# Altium PCB PCB1.PcbDoc (part 3 of 4)
Units mil, origin at the board's own origin, x right, y up, seen from the top; angles counter-clockwise.
Board outline 6000 x 4000 mil, 2 copper layers (Top Layer, Bottom Layer); 419 components, 314 nets, 2127 pads, 9 vias.
Unrouted connection lines stored in the file: 1258.
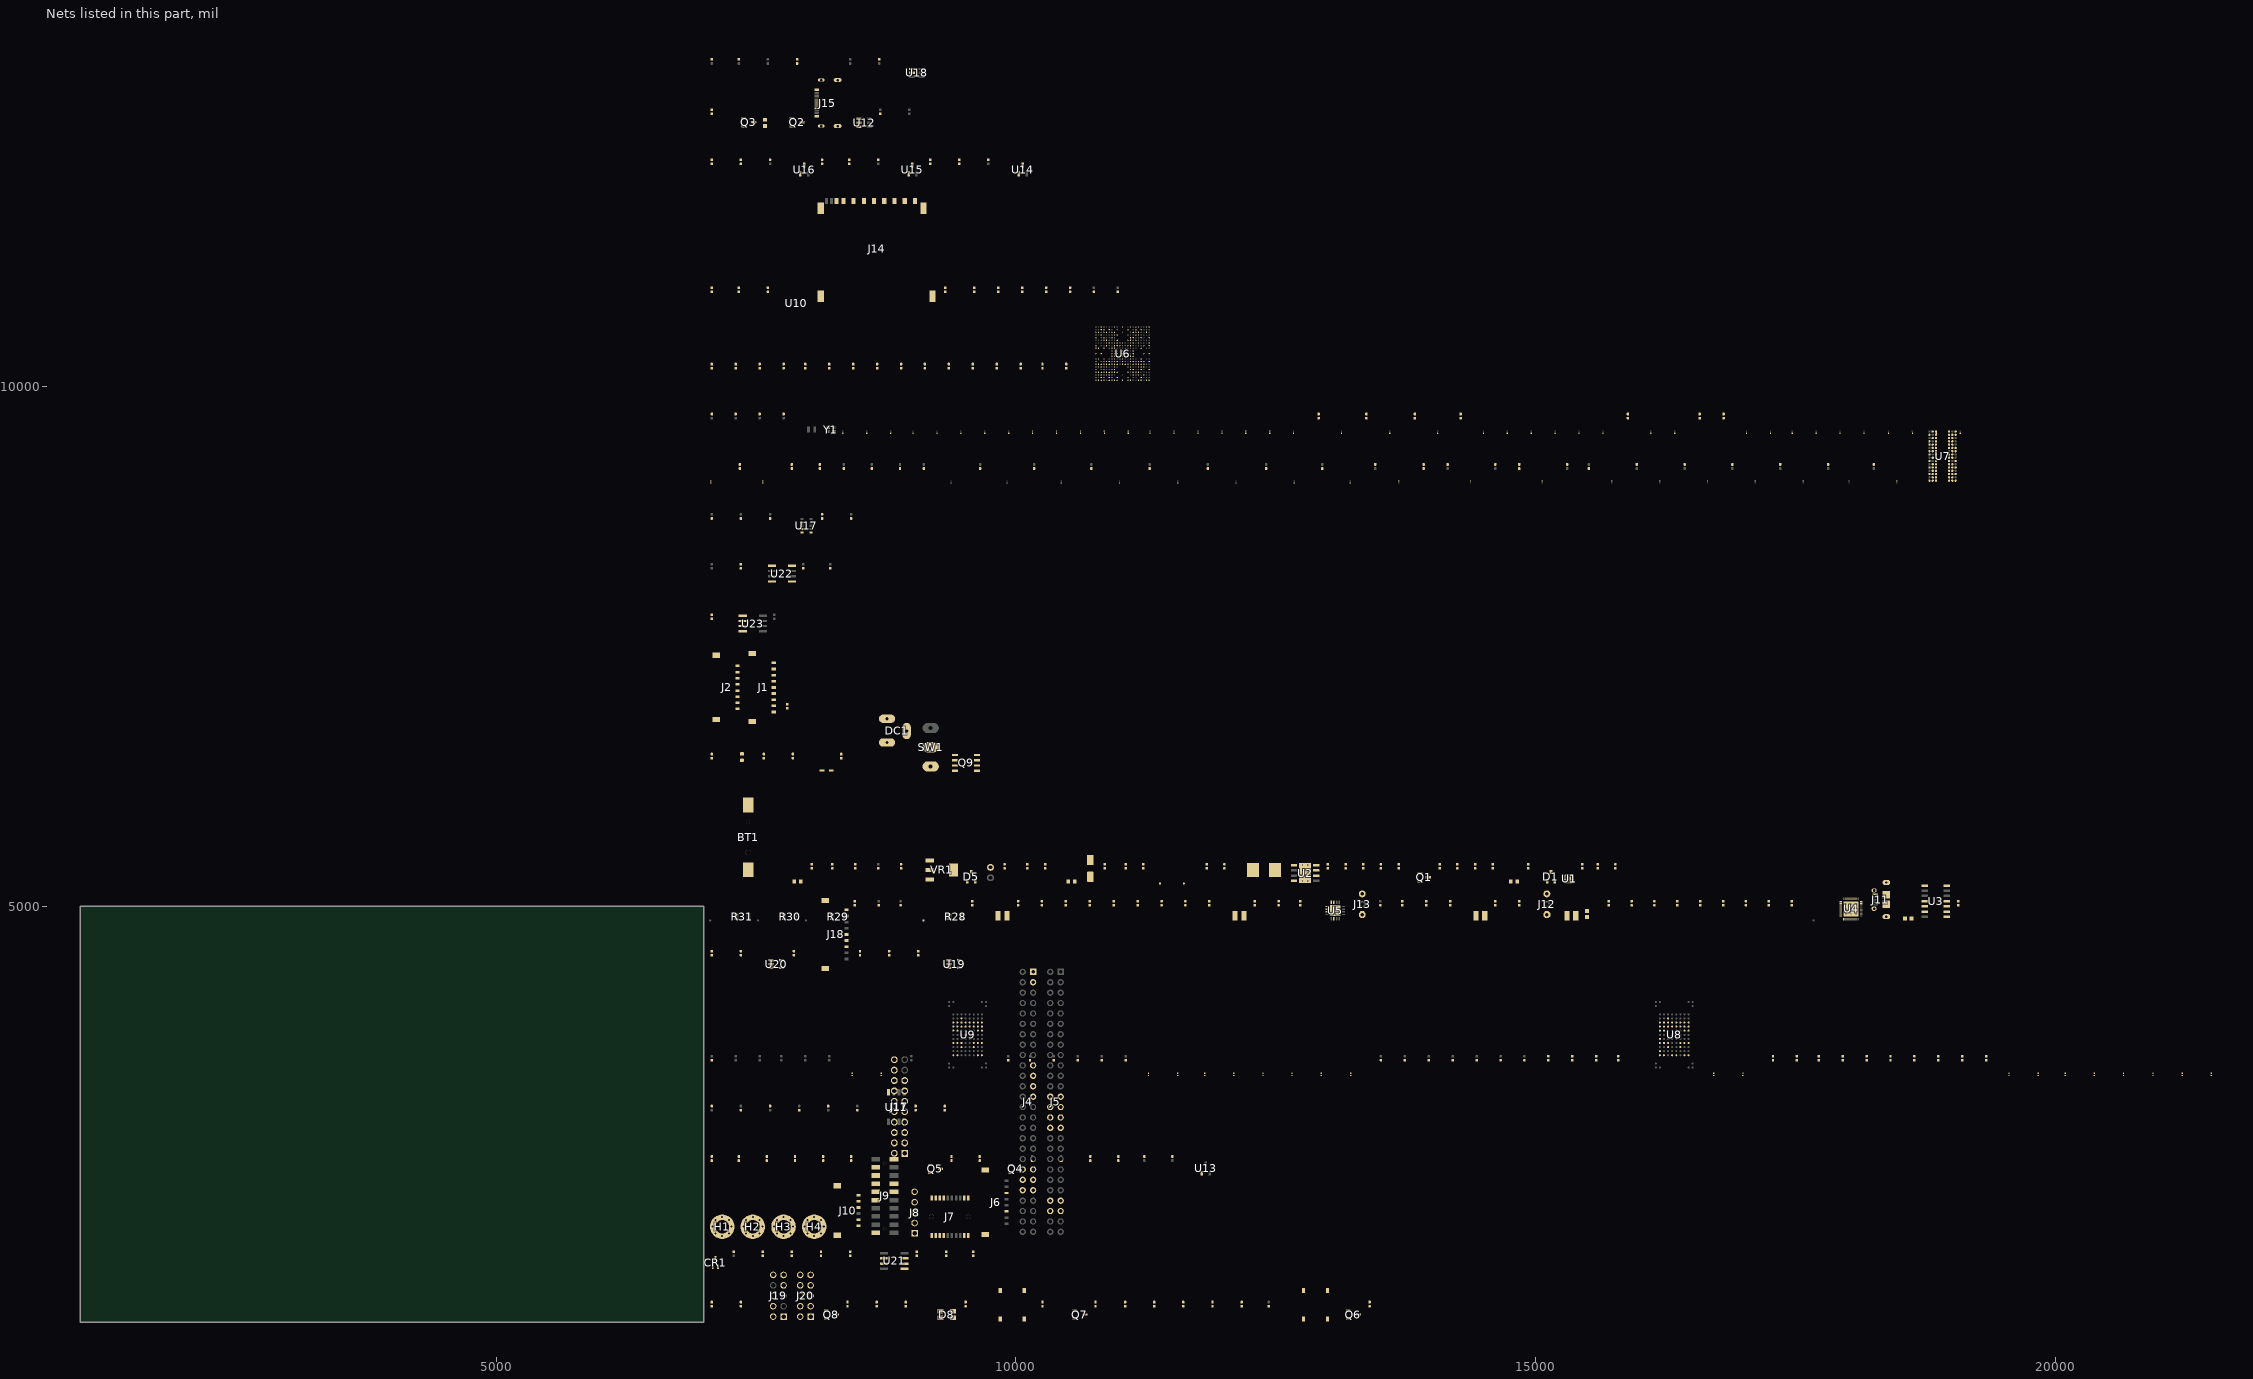
[diagram p2: the nets of this part, all layers, seen from the top]

## Part data (continued)
U5: library part PAC1934T-I/JQ, "IC CURRENT MONITOR 1% 16UQFN", Manufacturer 1="Microchip Technology", Operating Temperature="-40C to +85C", Category=MCHP-Analog, ComponentLink1Description="SVN Datasheet", ComponentLink1URL=https://www.microchip.com/sitesearch/search/Product%20and%20Development%20Tools/PAC1934T-I/JQ, ComponentLink2Description="Local Datasheet", ComponentLink3Description="Open Symbol", ComponentLink3URL="C:\ALTIUM_WORK\00001_MCHP-CDB\Library\LibraryRefs\PAC1934 UQFN-16.SchLib", ComponentLink4Description="Open Footprint", ComponentLink4URL=C:\ALTIUM_WORK\00001_MCHP-CDB\Library\Footprints\UQFN-16_4X4_EP2.6X2.6.PcbLib, ComponentLink5Description="Open Footprint 2", ComponentLink6Description="Open Footprint 3", ComponentLink7Description="Open Footprint 4", Description_="MCHP ANALOG POWER CURRENT SENSE MONITOR PAC1934T-I/JQ UQFN-16", Dev Tools Status=Production, Manufacturer Part Number 1=PAC1934T-I/JQ, MCHP-ID=MIC7010, Owner="Razvan Cristescu", Populated=YES, Quantity Override=1, Restricted Sourcing=No, Revision=2, Status="MCL Design", Supplier 1="Microchip Technology", Supplier Part Number 1=PAC1934T-I/JQ, Symbol="PAC1934 UQFN-16", Type="Power/Current Sensor"
U6: "SAMA7D65 MPU 1000MHz Cortex-A7 TFBGA-343", Manufacturer 1="Microchip Technology", Manufacturer Part Number 1=SAMA7D65-V/4HB-SL3, Operating Temperature="-40C to +105C", Category=MCHP-Microcontroller, ComponentLink1Description="SVN Datasheet", ComponentLink1URL=https://www.microchip.com/sitesearch/search/Product%20and%20Development%20Tools/SAMA7D65-V/4HB-SL3, ComponentLink2Description="Local Datasheet", ComponentLink3Description="Open Symbol", ComponentLink3URL=C:\ALTIUM_WORK\00001_MCHP-CDB\Library\LibraryRefs\SAMA7D65-TFBGA-343.SchLib, ComponentLink4Description="Open Footprint", ComponentLink4URL=C:\ALTIUM_WORK\00001_MCHP-CDB\Library\Footprints\TFBGA-343_14x14.PcbLib, ComponentLink5Description="Open Footprint 2", ComponentLink6Description="Open Footprint 3", ComponentLink7Description="Open Footprint 4", Description_="MCHP MPU 32-BIT Cortex-A7 1000MHz 128kB SAMA7D65-V/4HB-SL3 TFBGA-343", Dev Tools Status=Design, MCHP-ID=IC2674, Owner="Ciprian Abramov", Populated=YES, Quantity Override=1, Restricted Sourcing=No, Revision=1, Status="MCL Design", Supplier 1="Microchip Technology", Supplier Part Number 1=SAMA7D65-V/4HB-SL3, Symbol=SAMA7D65-TFBGA-343, Type="32-Bit MPU"
U7: library part AS4C512M16D3LA-10BIN, "IC DRAM 8GBIT PAR 96FBGA", Manufacturer 1="Alliance Memory, Inc.", Operating Temperature="-40C to +95C", Package=TFBGA-96, Supplier Part Number 1=1450-1488-ND, Category=IC, ComponentLink1Description="SVN Datasheet", ComponentLink1URL=https://chn-vm-apps.microchip.com/mchprepo/parts/Datasheets/AllianceMemory_DDR3L_8G_AS4C512M16D3LA-10BCN-BIN-BAN_Feb2019_v1.0.pdf, ComponentLink2Description="Local Datasheet", ComponentLink2URL=C:\ALTIUM_WORK\00001_MCHP-CDB\Datasheets\AllianceMemory_DDR3L_8G_AS4C512M16D3LA-10BCN-BIN-BAN_Feb2019_v1.0.pdf, ComponentLink3Description="Open Symbol", ComponentLink3URL="C:\ALTIUM_WORK\00001_MCHP-CDB\Library\LibraryRefs\AS4C512M16D3LA-10BIN TFBGA-96.SchLib", ComponentLink4Description="Open Footprint", ComponentLink4URL=C:\ALTIUM_WORK\00001_MCHP-CDB\Library\Footprints\TFBGA-96_13.5x9.PcbLib, ComponentLink5Description="Open Footprint 2", ComponentLink6Description="Open Footprint 3", ComponentLink7Description="Open Footprint 4", Description_="IC MEMORY AS4C512M16D3LA-10BIN DDR3L 8Gb 933MHz FBGA-96", Dev Tools Status=Design, Manufacturer Part Number 1=AS4C512M16D3LA-10BIN, MCHP-ID=IC1748, Owner="Ciprian Abramov", Populated=YES, Quantity Override=1, Restricted Sourcing=No, Revision=1, Status="MCL Design", Supplier 1=Digi-Key, Symbol="AS4C512M16D3LA-10BIN TFBGA-96", Type=Memory, Vin=1.35V
U10: "Power Switch/Driver 1:1 P-Channel 2A 4-TMLFÂ® (0.85x0.85)", Package="UFDFN-4 Microchip", Check_prices=https://www.snapeda.com/parts/MIC94085YFT-TR/Microchip+Technology/view-part/?ref=eda, MF=Microchip, MP=MIC94085YFT-TR, SnapEDA_Link=https://www.snapeda.com/parts/MIC94085YFT-TR/Microchip+Technology/view-part/?ref=snap
U11: "MRAM Avalanche High Performance Serial P-SRAM 4Mb in SOIC8 package with QSPI - 108MHz interface, 3V, -40 C to 105 C", Manufacturer_Name="Avalanche Technology", Mouser Part Number=793-30042040108X0PSY, Datasheet Link=https://www.mouser.ph/ProductDetail/Avalanche-Technology/AS3004204-0108X0PSAY?qs=eP2BKZSCXI7G0ggegRejGg%3D%3D, Geometry.Height=2.16mm, Manufacturer_Part_Number=AS3004204-0108X0PSAY, Mouser Price/Stock=https://www.mouser.co.uk/ProductDetail/Avalanche-Technology/AS3004204-0108X0PSAY/?qs=eP2BKZSCXI7G0ggegRejGg%3D%3D
U12: "17V Clamp 5A (8/20Âµs) Ipp Tvs Diode Surface Mount SOT-23-6", Package="SOT-23-6 STMicroelectronics", Availability="In Stock", Check_prices=https://www.snapeda.com/parts/USBLC6-2SC6/STMicroelectronics/view-part/?ref=eda, MF=STMicroelectronics, MP=USBLC6-2SC6, Price=None, Purchase-URL=https://pricing.snapeda.com/search/part/USBLC6-2SC6/?ref=eda, SnapEDA_Link=https://www.snapeda.com/parts/USBLC6-2SC6/STMicroelectronics/view-part/?ref=snap
U13: library part MCP1700T-3302E/TT, "IC REG LINEAR 3.3V 250MA SOT23-3", Manufacturer 1="Microchip Technology", Operating Temperature="-40C to +125C", Category=MCHP-Analog, ComponentLink1Description="SVN Datasheet", ComponentLink1URL=https://www.microchip.com/sitesearch/search/Product%20and%20Development%20Tools/MCP1700T-3302E/TT, ComponentLink2Description="Local Datasheet", ComponentLink3Description="Open Symbol", ComponentLink3URL="C:\ALTIUM_WORK\00001_MCHP-CDB\Library\LibraryRefs\MCP170X SOT-23-3_SOT-23A-3.SchLib", ComponentLink4Description="Open Footprint", ComponentLink4URL=C:\ALTIUM_WORK\00001_MCHP-CDB\Library\Footprints\SOT-23-3.PcbLib, ComponentLink5Description="Open Footprint 2", ComponentLink6Description="Open Footprint 3", ComponentLink7Description="Open Footprint 4", Description_="MCHP ANALOG LDO 3.3V MCP1700T-3302E/TT SOT-23-3", Dev Tools Status=Production, Manufacturer Part Number 1=MCP1700T-3302E/TT, MCHP-ID=MIC0598, Populated=Yes, Quantity Override=1, Revision=1, Status="MCL Design", Supplier 1="Microchip Technology", Supplier Part Number 1=MCP1700T-3302E/TT, Symbol="MCP170X SOT-23-3_SOT-23A-3", Type=LDO
U14 U15 U16: "No Description Available", Manufacturer_Name=Microchip, Copyright="Copyright (C) 2025 Ultra Librarian. All rights reserved.", Manufacturer_Part_Number=TC1047AVNBTR, RefDes=RefDes, Type=Type
U17: "Real-Time Clock Module with I2C-Bus", Package=None, Availability=Unavailable, MP=RV-3129-C3-32.768KHZ-OPTION-A-TB-QA, Price=None
U18: "OSC PROG TIMER TSOT23-6"
U19 U20: "Automotive LVDS Differential Driver"
U21: "3.3 V CAN Transceiver with Standby Mode", Package="SOIC-8 Texas Instruments", Check_prices=https://www.snapeda.com/parts/SN65HVD230DR/Texas+Instruments/view-part/?ref=eda, MF="Texas Instruments", MP=SN65HVD230DR, SnapEDA_Link=https://www.snapeda.com/parts/SN65HVD230DR/Texas+Instruments/view-part/?ref=snap
U22: "Low-Power, Slew-Rate-Limited RS-485/RS-422 Transceivers, IC TRANSCEIVER HALF 1/1 8SOIC", Manufacturer_Name="Analog Devices Inc", Manufacturer_Part_Number=MAX485CSA+T, Copyright="Copyright (C) 2025 Ultra Librarian. All rights reserved.", RefDes=RefDes, Type=Type
U23: "Low-Power, Slew-Rate-Limited RS-485/RS-422, IC TRANSCEIVER FULL 1/1 8SOIC", Manufacturer_Name="Analog Devices Inc", Manufacturer_Part_Number=MAX488ESA+T, Copyright="Copyright (C) 2025 Ultra Librarian. All rights reserved.", Digi-Key_Part_Number_1=MAX488ESA+CT-ND, Digi-Key_Part_Number_2=MAX488ESA+DKR-ND, Digi-Key_Part_Number_3=MAX488ESA+T-ND, Digi-Key_Part_Number_4=MAX488ESA+TR-ND, RefDes=RefDes, Type=Type
VR1: "800-mA 15-V linear voltage regulator", Package="SOT-223-4 Texas Instruments", Check_prices=https://www.snapeda.com/parts/LM1117MP-3.3/NOPB/Texas+Instruments/view-part/?ref=eda, MF="Texas Instruments", MP=LM1117MP-3.3/NOPB, SnapEDA_Link=https://www.snapeda.com/parts/LM1117MP-3.3/NOPB/Texas+Instruments/view-part/?ref=snap
Y1: library part ECS-240-10-37B2-JTN-TR, "CRYSTAL 24 MHZ 10PF SMD", Load Capacitance=10pF, Manufacturer 1="ECS Inc", Operating Temperature="-40C to +85C", Package=L2.0W1.6H0.5, Supplier Part Number 1=50-ECS-240-10-37B2-JTN-TR-ND, Tolerance=20ppm, Category=Crystal/Oscillator, ComponentLink1Description="SVN Datasheet", ComponentLink1URL=https://chn-vm-apps.microchip.com/mchprepo/parts/Datasheets/ECX-1637B2.pdf, ComponentLink2Description="Local Datasheet", ComponentLink2URL=C:\ALTIUM_WORK\00001_MCHP-CDB\Datasheets\ECX-1637B2.pdf, ComponentLink3Description="Open Symbol", ComponentLink3URL="C:\ALTIUM_WORK\00001_MCHP-CDB\Library\LibraryRefs\Crystal 4 Pins.SchLib", ComponentLink4Description="Open Footprint", ComponentLink4URL=C:\ALTIUM_WORK\00001_MCHP-CDB\Library\Footprints\CRYSTAL_L2.0W1.6H0.5_FA-128.PcbLib, ComponentLink5Description="Open Footprint 2", ComponentLink6Description="Open Footprint 3", ComponentLink7Description="Open Footprint 4", Description_="CRYSTAL 24MHz 10pF SMD L2W1.6H0.5", Dev Tools Status=Design, Manufacturer Part Number 1=ECS-240-10-37B2-JTN-TR, MCHP-ID=OSC1299, Owner="Ciprian Abramov", Populated=YES, Quantity Override=1, Revision=1, Status="MCL Design", Supplier 1=Digi-Key, Symbol="Crystal 4 Pins", Type=Crystal
Y2: library part "FC-12M 32.7680KA-A3", "CRYSTAL 32.7680KHZ 12.5PF SMD", Load Capacitance=12.5pF, Manufacturer 1=Epson, Operating Temperature="-40°C ~ 85°C", Package="2-SMD, No Lead", Supplier Part Number 1=SER3672CT-ND, Tolerance=20ppm, Category=Crystal/Oscillator, ComponentLink1Description="SVN Datasheet", ComponentLink1URL=https://chn-vm-apps.microchip.com/mchprepo/parts/Datasheets/FC-12D_en.pdf, ComponentLink2Description="Local Datasheet", ComponentLink2URL=C:\ALTIUM_WORK\00001_MCHP-CDB\Datasheets\FC-12D_en.pdf, ComponentLink3Description="Open Symbol", ComponentLink3URL="C:\ALTIUM_WORK\00001_MCHP-CDB\Library\LibraryRefs\Crystal 2 Pins.SchLib", ComponentLink4Description="Open Footprint", ComponentLink4URL=C:\ALTIUM_WORK\00001_MCHP-CDB\Library\Footprints\CRYSTAL_FC-12M_L2.05W1.2H0.6.PcbLib, ComponentLink5Description="Open Footprint 2", ComponentLink6Description="Open Footprint 3", ComponentLink7Description="Open Footprint 4", Description_="CRYSTAL 32.768KHZ 12.5PF SMD 2-SMD, No Lead, FC-12M 32.7680KA-A3", Dev Tools Status=Design, Manufacturer Part Number 1="FC-12M 32.7680KA-A3", MCHP-ID=OSC1269, Owner="Dragos Danaila", Populated=YES, Quantity Override=1, Revision=1, Status="MCL Design", Supplier 1=Digikey, Symbol="Crystal 2 Pins", Type=Crystal

## Via types
v1: diameter 21.65, hole 11.81, Top Layer to Bottom Layer, 9 vias

## Nets (pads, with @x,y where several pads share a name; then routed paths per layer and width w, separated by ;. In a path a pad name is that pad's centre, name@x,y a point inside that pad or via, vN(x,y) a via of type N, cw(c..) or ccw(c..) an arc to the next point about the centre after c; other vN are vias at no path point)
3V3: C16.2 C17.2 C23.2 C24.2 C25.2 C26.2 C55.2 C56.2 C57.2 C58.2 C61.2 C62.2 C63.2 C64.2 C65.2 C141.2 C143.2 C144.2 C148.2 C150.2 C152.2 C154.2 C156.2 C157.2 C158.2 C159.2 C160.2 C161.2 C162.2 C168.2 C169.2 D5.1 D8.2 J7.03 J7.04 J7.17 J7.18 J9.2 J17.1 J17.2 J19.10 J20.6 J20.8 J20.10 Q4.1 Q5.1 R14.2 R18.2 R20.1 R22.2 R23.2 R24.1 R25.2 R26.2 R28.2 R33.1 R39.1 R41.1 R43.1 R44.1 R49.1 R52.1 R94.1 R95.1 R96.1 R97.1 R98.1 R99.1 R100.1 R101.2 R110.1 R111.1 R116.2 R117.2 R118.2 R119.2 R120.2 R125.1 R126.1 R127.1 R140.1 R151.1 R152.1 TP4.0 U3.1 U3.11 U4.9 U5.2 U5.15 U6.C17 U6.F13 U6.G7 U6.H19 U6.L3 U6.L19 U6.P19 U6.T13 U10.3 U11.8 U14.1 U15.1 U16.1 U17.2 U18.1 U19.1 U20.1 U21.3 U22.8 U23.1
3V3_eMMC: C12.2 C13.2 C59.2 C60.2 C120.2 C121.2 C122.2 C123.2 C124.2 C125.2 C126.2 C127.2 C128.2 C129.2 C130.2 C131.2 C132.2 C133.2 C134.2 C135.2 C136.2 C137.2 C138.2 C139.2 R13.2 R60.1 R61.1 R62.1 R63.1 R64.1 R65.1 R66.1 R67.1 R68.1 R69.1 R80.1 R81.1 R82.1 R83.1 R84.1 R85.1 R86.1 R93.1 U6.F9 U6.W17 U8.E4@16270.94,3922.48 U8.F2@16192.2,3883.11 U8.F3@16231.57,3883.11 U8.F4@16270.94,3883.11 U8.F5@16310.31,3883.11 U8.F6@16349.68,3883.11 U8.F7@16389.06,3883.11 U8.F8@16428.43,3883.11 U8.F9@16467.8,3883.11 U8.H3@16231.57,3804.37 U8.H8@16428.43,3804.37 U8.L2@16192.2,3686.26 U8.L4@16270.94,3686.26 U8.L7@16389.06,3686.26 U8.L9@16467.8,3686.26 U8.P3@16231.57,3568.15 U8.P8@16428.43,3568.15 U9.E4@9475.94,3922.48 U9.F2@9397.2,3883.11 U9.F3@9436.57,3883.11 U9.F4@9475.94,3883.11 U9.F5@9515.31,3883.11 U9.F6@9554.68,3883.11 U9.F7@9594.06,3883.11 U9.F8@9633.43,3883.11 U9.F9@9672.8,3883.11 U9.H3@9436.57,3804.37 U9.H8@9633.43,3804.37 U9.L2@9397.2,3686.26 U9.L4@9475.94,3686.26 U9.L7@9594.06,3686.26 U9.L9@9672.8,3686.26 U9.P3@9436.57,3568.15 U9.P8@9633.43,3568.15 VR1.2 VR1.4
3V3_SDCARD: C140.2 C142.2 J14.4 U10.1
5V: C9.2 C10.2 C11.2 C15.2 C19.2 C21.2 C27.2 C29.2 C30.2 L1.2 Q2.1 Q3.1 R1.2 R2.2 R10.2 R11.1 TP2.0 U4.4 U4.10 U4.15 U4.20 U4.26 U4.31 VR1.3
12V: C2.2 C7.2 C8.2 R3.2 SB1.2 TP1.0 U1.6 U2.7
12V_aux: C171.2 D1.2 D9.1 Q9.1 Q9.2 Q9.3 R155.2
12V_EXP: C1.2 D1.1 J1.1 J1.2 J1.3
12V_IN: C3.2 D1.3 R4.1 SB1.1 U1.5
12V_JACK: C170.2 Q9.5 Q9.6 Q9.7 Q9.8 SW1.1
ADC_TEMP_1: C149.2 R122.2 U6.H5
ADC_TEMP_2: C151.2 R123.2 U6.D1
ADC_TEMP_3: C153.2 R124.2 U6.J7
AUXOFF: R1.1 U1.3
BUS_3V3: J5.27 J5.28
BUS_5V: J5.25 J5.26
CAN0_H: J1.8 J4.03 J7.07 R135.2
CAN0_L: J1.9 J4.01 J7.08 R136.2
CC1: J15.A5 Q2.3
CC2: J15.B5 Q3.3
CONN_USBA_N: J15.A7 J15.B7 U12.1
CONN_USBA_P: J15.A6 J15.B6 U12.3
DBGU_RX_FTDI: Q5.3 R113.2
DBGU_TX_FTDI: Q4.3 R112.2
DCDC1: C18.1 L2.2 R28.1
DCDC2: C20.1 L3.2 R29.1
DCDC3: C22.1 L4.2 R30.1
DCDC4: C28.1 L5.2 R31.1
DDR_A0: U6.W6 U7.N3
DDR_A1: U6.P6 U7.P7
DDR_A2: U6.V5 U7.P3
DDR_A3: U6.V6 U7.N2
DDR_A4: U6.R6 U7.P8
DDR_A5: U6.W4 U7.P2
DDR_A6: U6.P7 U7.R8
DDR_A7: U6.W2 U7.R2
DDR_A8: U6.L8 U7.T8
DDR_A9: U6.V4 U7.R3
DDR_A10: U6.T3 U7.L7
DDR_A11: U6.M9 U7.R7
DDR_A12: U6.P5 U7.N7
DDR_A13: U6.V2 U7.T3
DDR_A14: U6.L9 U7.T7
DDR_A15: U6.R4 U7.M7
DDR_BA0: U6.V8 U7.M2
DDR_BA1: U6.P4 U7.N8
DDR_BA2: U6.R8 U7.M3
DDR_CAS: U6.T8 U7.K3
DDR_CK_N: U6.T4 U7.K7
DDR_CK_P: U6.U4 U7.J7
DDR_CKE: U6.V3 U7.K9
DDR_CS: U6.V7 U7.L2
DDR_D0: U6.N2 U7.E3
DDR_D1: U6.M7 U7.F7
DDR_D2: U6.R3 U7.F2
DDR_D3: U6.M8 U7.F8
DDR_D4: U6.T2 U7.H3
DDR_D5: U6.N8 U7.H8
DDR_D6: U6.T1 U7.G2
DDR_D7: U6.N7 U7.H7
DDR_D8: U6.Y7 U7.D7
DDR_D9: U6.AA4 U7.C3
DDR_D10: U6.Y9 U7.C8
DDR_D11: U6.Y3 U7.C2
DDR_D12: U6.AA7 U7.A7
DDR_D13: U6.AA3 U7.A2
DDR_D14: U6.W7 U7.B8
DDR_D15: U6.W3 U7.A3
DDR_DQM0: U6.N1 U7.E7
DDR_DQM1: U6.Y4 U7.D3
DDR_DQS0_N: U6.R2 U7.G3
DDR_DQS0_P: U6.R1 U7.F3
DDR_DQS1_N: U6.AA6 U7.B7
DDR_DQS1_P: U6.Y6 U7.C7
DDR_ODT: U6.W1 U7.K1
DDR_RAS: U6.U8 U7.J3
DDR_RESET: R55.1 U6.V1 U7.T2
DDR_VREF: C95.1 C115.1 C117.2 C118.1 C119.1 R57.1 R58.2 U6.Y1 U7.H1 U7.M8
DDR_WE: U6.N10 U7.L3
EXP_USB_N: J2.8 U6.J1
EXP_USB_P: J2.7 U6.J2
FLEXCOM0_IO0_PA12: U6.W15 U22.4
FLEXCOM0_IO1_PA13: U6.P11 U22.1
FLEXCOM1_IO0_PD7: J4.42 R41.2 R42.1 R46.2
FLEXCOM1_IO1_PD6: J4.44 R39.2 R40.1 R45.2
FLEXCOM3_IO0_PA24: U6.P9 U23.3
FLEXCOM3_IO1_PA23: U6.AA20 U23.2
FLEXCOM4_IO0_PA18: J2.3 J4.23 U6.W16
FLEXCOM4_IO1_PA17: J2.4 J4.25 U6.R9
FLEXCOM4_IO2_PA16: J2.2 J4.21 U6.V15
FLEXCOM4_IO3_PA15: J2.1 J4.19 U6.N11
FLEXCOM5_IO0_PD16: J2.6 J4.41 J7.06 J10.1 J10.2 R43.2 R47.2
FLEXCOM5_IO1_PD17: J2.5 J4.43 J7.05 J10.5 J10.6 R44.2 R48.2
FLEXCOM6_IO0_PA28: J4.39 J9.14 U6.L13
FLEXCOM7_IO0_PD8: J9.12 U6.G14
FLEXCOM7_IO1_PD9: J9.11 U6.F14
FLEXCOM8_IO0_PA29: U6.K15 U19.5
FLEXCOM8_IO2_PB1: U6.G21 U20.5
FLEXCOM9_IO0_PC3: R15.1 R114.1 U6.G8
FLEXCOM9_IO1_PC4: R16.1 R115.1 U6.C2
FLEXCOM10_IO0_PB6: R49.2 R50.1 R51.1 U6.K13
FLEXCOM10_IO1_PB7: R52.2 R53.1 R54.1 U6.C20
FLT#: R2.1 U1.4
GND: BT1.N BT2.1 BT3.1 BT4.1 BT5.1 C1.1 C2.1 C3.1 C4.1 C5.1 C7.1 C8.1 C9.1 C10.1 C11.1 C12.1 C13.1 C14.1 C15.1 C16.1 C17.1 C18.2 C19.1 C20.2 C21.1 C22.2 C23.1 C24.1 C25.1 C26.1 C27.1 C28.2 C29.1 C30.1 C31.1 C32.1 C33.1 C34.1 C35.1 C36.1 C37.1 C38.1 C39.1 C40.1 C41.1 C42.1 C43.1 C44.1 C45.1 C46.1 C47.1 C48.1 C49.1 C50.1 C51.1 C52.1 C53.1 C54.1 C55.1 C56.1 C57.1 C58.1 C59.1 C60.1 C61.1 C62.1 C63.1 C64.1 C65.1 C66.1 C67.1 C68.1 C69.1 C70.1 C71.1 C72.1 C73.1 C74.2 C75.2 C76.2 C77.2 C78.2 C79.2 C80.2 C81.2 C82.2 C83.2 C84.2 C85.2 C86.2 C87.2 C88.2 C89.2 C90.2 C91.2 C92.2 C93.2 C94.2 C95.2 C96.2 C97.2 C98.2 C99.1 C100.1 C101.1 C102.1 C103.1 C104.1 C105.1 C106.1 C107.1 C108.1 C109.1 C110.1 C111.1 C112.1 C113.1 C114.1 C116.1 C117.1 C118.2 C119.2 C120.1 C121.1 C122.1 C123.1 C124.1 C125.1 C126.1 C127.1 C128.1 C129.1 C130.1 C131.1 C132.1 C133.1 C134.1 C135.1 C136.1 C137.1 C138.1 C139.1 C140.1 C141.1 C142.1 C143.1 C144.1 C145.1 C146.1 C147.1 C148.1 C149.1 C150.1 C151.1 C152.1 C153.1 C154.1 C155.1 C156.1 C157.1 C158.1 C159.1 C160.1 C161.1 C162.1 C163.1 C164.1 C165.1 C166.1 C167.1 C168.1 C169.1 C170.1 C171.1 CR1.3 D2.1 D3.1 D4.1 D6.1 D10.1 DC1.2 DC1.3 FB1.2 FB2.1 H1.1 H2.1 H3.1 H4.1 J1.4 J1.5 J1.6 J1.M1 J1.M2 J2.M1 J2.M2 J5.29 J5.30 J5.31 J5.32 J5.47 J5.48 J6.3 J6.6 J6.M1 J6.M2 J7.01 J7.02 J7.19 J7.20 J8.5 J9.10 J9.13 J9.16 J9.18 J10.3 J10.7 J11.5 J14.3 J14.6 J14.12 J15.A1_B12 J15.B1_A12 J17.4 J17.6 J17.8 J17.10 J17.12 J17.14 J17.16 J17.18 J17.20 J18.5 J18.M1 J18.M2 J19.1 J19.2 J20.1 J20.2 J20.5 Q1.2 Q6.2 Q7.2 Q8.2 R7.2 R8.2 R9.2 R12.2 R27.2 R32.2 R34.1 R35.1 R36.1 R37.1 R38.1 R56.2 R58.1 R59.1 R109.1 R131.2 R132.2 R139.2 R143.2 R147.2 R149.1 R150.1 R156.1 U1.8 U2.6 U2.9 U3.14 U4.3 U4.12 U4.13 U4.28 U4.29 U4.33 U5.3 U5.17 U6.A1 U6.A11 U6.A14 U6.A17 U6.A21 U6.AA1 U6.AA8 U6.AA9 U6.AA11 U6.AA14 U6.AA17 U6.AA21 U6.B6 U6.C4 U6.C7 U6.D9 U6.D13 U6.E1 U6.E7 U6.E15 U6.E21 U6.F16 U6.G5 U6.G9 U6.G11 U6.G15 U6.G17 U6.H1 U6.H8 U6.H9 U6.H14 U6.H21 U6.J4 U6.J18 U6.K11 U6.L1 U6.L7 U6.L11 U6.L15 U6.L21 U6.N4 U6.N18 U6.P1 U6.P8 U6.P14 U6.P21 U6.R5 U6.R7 U6.R11 U6.R15 U6.R17 U6.T5 U6.T17 U6.U1 U6.U7 U6.U15 U6.U21 U6.V9 U6.V13 U6.W5 U7.A9 U7.B1 U7.B3 U7.B9 U7.D1 U7.D8 U7.E1 U7.E2 U7.E8 U7.F9 U7.G1 U7.G8 U7.G9 U7.J2 U7.J8 U7.M1 U7.M9 U7.P1 U7.P9 U7.T1 U7.T9 U8.G2@16192.2,3843.74 U8.G3@16231.57,3843.74 U8.G4@16270.94,3843.74 U8.G5@16310.31,3843.74 U8.G6@16349.68,3843.74 U8.G7@16389.06,3843.74 U8.G8@16428.43,3843.74 U8.G9@16467.8,3843.74 U8.H2@16192.2,3804.37 U8.H9@16467.8,3804.37 U8.J5@16310.31,3765 U8.L3@16231.57,3686.26 U8.L8@16428.43,3686.26 U8.M4@16270.94,3646.89 U8.M7@16389.06,3646.89 U8.P2@16192.2,3568.15 U8.P9@16467.8,3568.15 U9.G2@9397.2,3843.74 U9.G3@9436.57,3843.74 U9.G4@9475.94,3843.74 U9.G5@9515.31,3843.74 U9.G6@9554.68,3843.74 U9.G7@9594.06,3843.74 U9.G8@9633.43,3843.74 U9.G9@9672.8,3843.74 U9.H2@9397.2,3804.37 U9.H9@9672.8,3804.37 U9.J5@9515.31,3765 U9.L3@9436.57,3686.26 U9.L8@9633.43,3686.26 U9.M4@9475.94,3646.89 U9.M7@9594.06,3646.89 U9.P2@9397.2,3568.15 U9.P9@9672.8,3568.15 U10.2 U11.4 U12.2 U13.1 U14.3 U15.3 U16.3 U17.6 U18.2 U19.2 U20.2 U21.2 U22.5 U23.4 VR1.1 Y1.2 Y1.4
  other v1: 17982.76,4927.76 18030,4927.76 18077.24,4927.76 17982.76,4975 18030.01,4975 18077.24,4975 17982.76,5022.25 18030,5022.25 18077.24,5022.25
GND_USBA: C145.2 FB2.2 J15.S1 J15.S2 J15.S3 J15.S4
GOM_VBAT: J5.45 J5.46
LVDS_TxC_N: J18.7 R134.2 U20.3
LVDS_TxC_P: J18.6 R134.1 U20.4
LVDS_TxD_N: J18.2 R133.2 U19.3
LVDS_TxD_P: J18.1 R133.1 U19.4
MCP2221A_SCL: J12.3 R20.2 U3.10
MCP2221A_SDA: J13.3 R24.2 U3.9
MRAM_QSPI_CLK: R106.2 U6.N14
MRAM_QSPI_CS: R102.1 U6.P18
MRAM_QSPI_D0: R107.2 U6.R19
MRAM_QSPI_D1: R103.1 U6.R18
MRAM_QSPI_D2: R105.1 U6.P17
MRAM_QSPI_D3: R104.2 U6.T19
NetBT1_P: BT1.P D5.2
NetBT2_2: BT2.2 C164.2 R141.1
NetBT3_2: BT3.2 C165.2 R140.2 R142.1
NetBT4_2: BT4.2 C166.2 U4.24
NetBT5_2: BT5.2 C167.2 R148.1
NetC4_2: C4.2 U1.10
NetC5_2: C5.2 U1.7
NetC6_1: C6.1 D3.2 L1.1 U2.8
NetC6_2: C6.2 U2.1
NetC163_2: C163.2 R137.2 R138.1 U21.5
NetCR1_1: CR1.1 R135.1 R137.1 U21.7
NetCR1_2: CR1.2 R136.1 R138.2 U21.6
NetD2_2: D2.2 R3.1
NetD4_2: D4.2 R10.1
NetD5_3: D5.3 J3.2
NetD6_2: D6.2 R13.1
NetD7_1: D7.1 U3.8
NetD7_2: D7.2 R14.1
NetD8_1: D8.1 R146.2
NetD8_3: D8.3 R144.2
NetD8_4: D8.4 R145.2
NetD9_2: D9.2 Q9.4 R156.2
NetD10_2: D10.2 R155.1
NetDC1_1: DC1.1 SW1.2
NetFB1_1: FB1.1 J11.0
NetJ1_7: J1.7 R6.1
NetJ4_40: J4.40 J9.19 U6.B18
NetJ8_1: J8.1 U6.AA13
NetJ8_2: J8.2 U6.Y13
NetJ8_3: J8.3 U6.AA18
NetJ8_4: J8.4 U6.Y18
NetJ12_1: J12.1 R54.2
NetJ13_1: J13.1 R51.2
NetJ14_1: J14.1 R98.2 U6.C16
NetJ14_2: J14.2 R94.2 U6.C15
NetJ14_5: J14.5 U6.D16
NetJ14_7: J14.7 R95.2 U6.B16
NetJ14_8: J14.8 R96.2 U6.D17
NetJ14_9: J14.9 R97.2 U6.A16
NetJ17_3: J17.3 R116.1 U6.F4
NetJ17_5: J17.5 R117.1 U6.B3
NetJ17_7: J17.7 R118.1 U6.F5
NetJ17_9: J17.9 R119.1 U6.A3
NetJ17_11: J17.11 R120.1
NetJ17_13: J17.13 U6.G6
NetJ17_15: J17.15 R121.1
NetJ19_4: J19.4 R34.2 U6.H10
NetJ19_6: J19.6 R19.1 U6.B4
NetJ19_7: J19.7 U6.D8
NetJ19_9: J19.9 U6.A4
NetJ20_3: J20.3 R150.2 U4.18
NetJ20_4: J20.4 R17.1 R149.2
NetJ20_7: J20.7 R22.1 R121.2 R128.2 R148.2 U4.2 U6.D3
NetJ20_9: J20.9 R33.2 R101.1 U6.E4 U10.4
NetL2_1: L2.1 U4.11
NetL3_1: L3.1 U4.14
NetL4_1: L4.1 U4.27
NetL5_1: L5.1 U4.30
NetQ1_1: Q1.1 R6.2 R8.1
NetQ1_3: Q1.3 R4.2 R5.1 U1.1
NetQ2_2: Q2.2 U6.C5
NetQ3_2: Q3.2 U6.J8
NetQ4_2: Q4.2 R110.2 R114.2
NetQ5_2: Q5.2 R111.2 R115.2
NetQ6_1: Q6.1 R143.1 U6.W19
NetQ6_3: Q6.3 R144.1
NetQ7_1: Q7.1 R147.1 U6.M15
NetQ7_3: Q7.3 R145.1
NetQ8_1: Q8.1 U6.M14
NetQ8_3: Q8.3 R146.1
NetR5_2: R5.2 R7.1 U1.2
NetR9_1: R9.1 U1.9 U6.C1
NetR11_2: R11.2 R12.1 U2.4
NetR15_2: R15.2 U3.5
NetR16_2: R16.2 U3.6
NetR17_2: R17.2 U4.23
NetR18_1: R18.1 U3.4
NetR19_2: R19.2 U4.8
NetR21_1: R21.1 R141.2 U4.7 U6.A8
NetR23_1: R23.1 U4.1 U6.D7
NetR25_1: R25.1 U5.16
NetR26_1: R26.1 U5.1 U6.C8
NetR27_1: R27.1 U5.6
NetR32_1: R32.1 U6.K7
NetR35_2: R35.2 U6.M13
NetR36_2: R36.2 U6.R16
NetR37_2: R37.2 U6.B13
NetR38_2: R38.2 U6.E14
NetR40_2: R40.2 U17.4
NetR42_2: R42.2 U17.5
NetR45_1: R45.1 U6.G10
NetR46_1: R46.1 U6.A20
NetR47_1: R47.1 U6.E18
NetR48_1: R48.1 U6.H13
NetR50_2: R50.2 U4.5
NetR53_2: R53.2 U4.6
NetR56_1: R56.1 U6.AA2
NetR59_2: R59.2 U7.L8
NetR60_2: R60.2 R72.1 U6.T18
NetR61_2: R61.2 R73.1 U6.P16
NetR62_2: R62.2 R74.1 U6.U14
NetR63_2: R63.2 R75.1 U6.R12
NetR64_2: R64.2 R76.1 U6.V16
NetR65_2: R65.2 R77.1 U6.T14
NetR66_2: R66.2 R78.1 U6.P15
NetR67_2: R67.2 R79.1 U6.R13
NetR68_2: R68.2 R70.1 U6.U18
NetR69_2: R69.2 R71.1 U6.V17
NetR70_2: R70.2 U8.P6@16349.68,3568.15
NetR71_2: R71.2 U8.P5@16310.31,3568.15
NetR72_2: R72.2 U8.K2@16192.2,3725.63
NetR73_2: R73.2 U8.N2@16192.2,3607.52